# Altium PCB LM2576 Buck Converter.PcbDoc
Units mil, origin at the board's own origin, x right, y up, seen from the top; angles counter-clockwise.
Board outline 3170 x 1235.65 mil, 2 copper layers (Top Layer, Bottom Layer); 9 components, 6 nets, 25 pads, 4 vias.
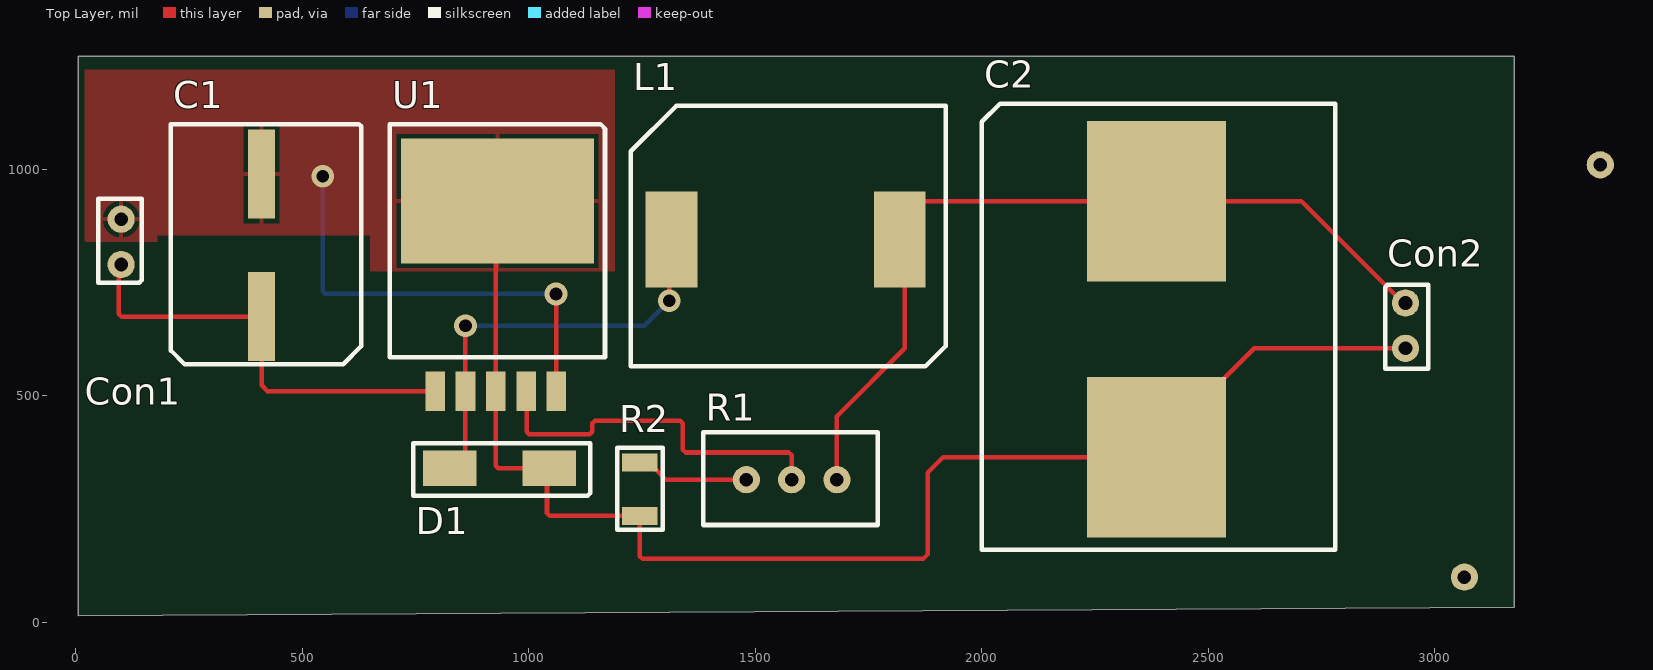
[diagram p0: Top Layer view]
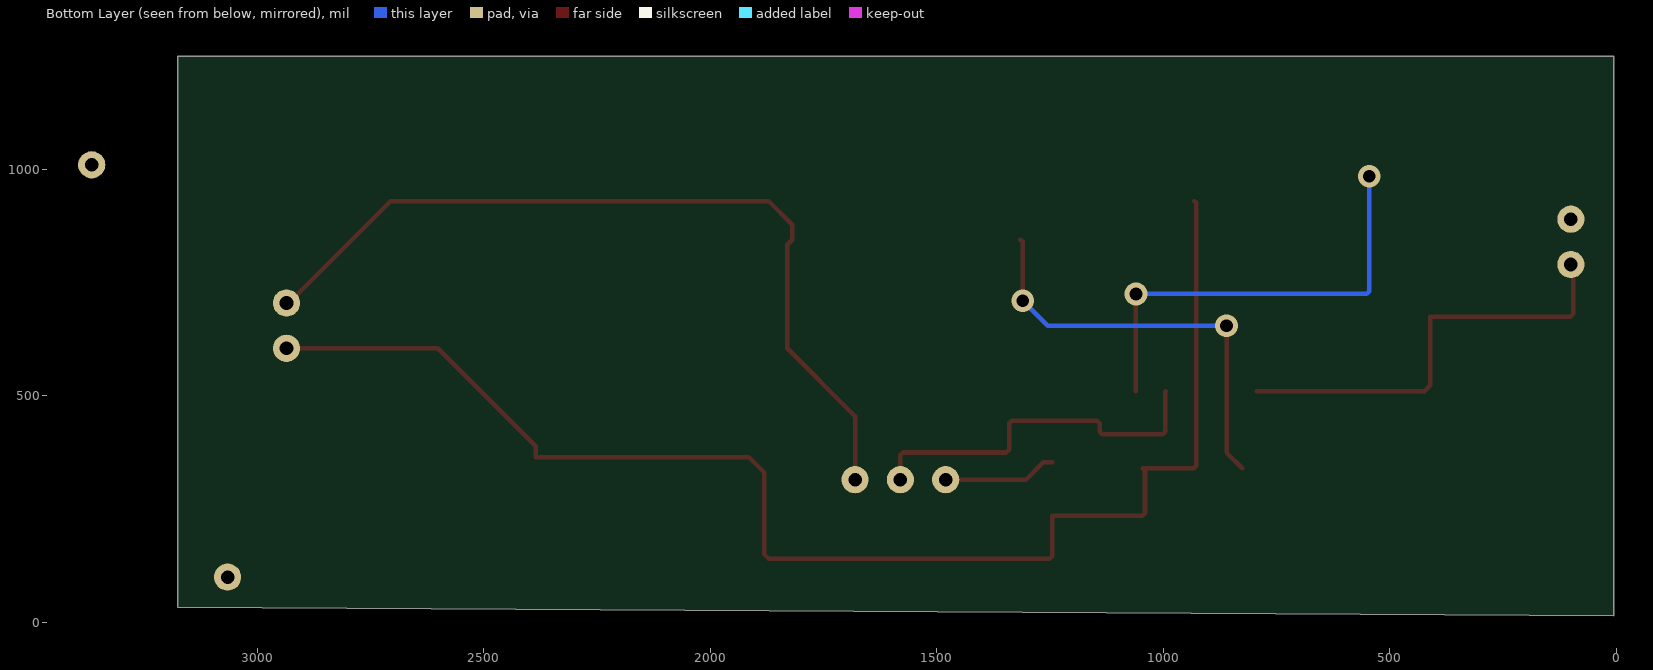
[diagram p1: Bottom Layer view, seen from below]
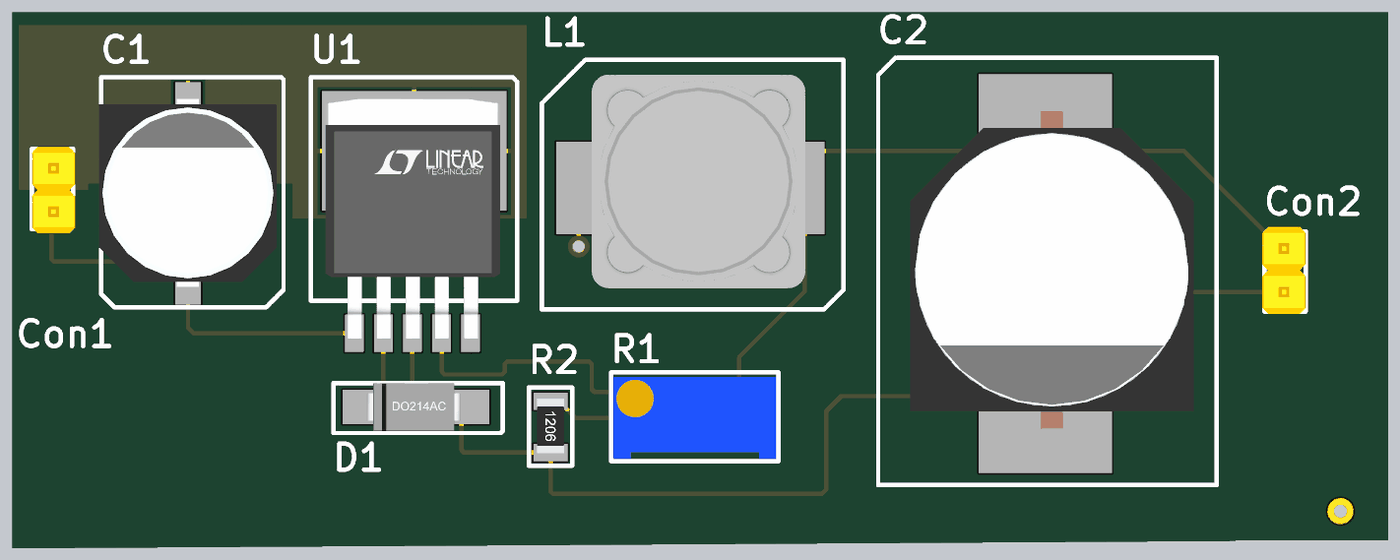
[diagram p2: 3D render of the assembled board from above, using the file's embedded part models]

## Layer stack, top to bottom
Top Solder: solder mask 0.4, Solder Resist, Dk 3.5
Top Layer: signal copper 1.4
Dielectric 1: dielectric 12.6, FR-4, Dk 4.8
Bottom Layer: signal copper 1.4
Bottom Solder: solder mask 0.4, Solder Resist, Dk 3.5

## Board outline
5,14.35 5,1250 3175,1250 3175,33.26

## Design rules (kind name [scope] priority, off if disabled: settings)
Clearance [All] p1: gap=10 ignorepadtopadclearanceinfootprint=FALSE except(0: Arc-Hole Track-Hole SMDPad-Hole THPad-Hole Via-Hole Fill-Hole Poly-Hole Region-Hole Text-Hole)
PolygonConnect [All] p1: connectstyle=Relief reliefconductorwidth=10 reliefentries=4 polygonreliefangle="90 Angle" airgapwidth=10
RoutingVias [All] p1: holewidth=28 width=50 viastyle="Through Hole" minholewidth=28 minwidth=50 maxholewidth=28 maxwidth=50
SilkToSilkClearance [All] p1: silktosilkclearance=0.1
SolderMaskExpansion [All] p1: expansion=4 istentingtop=FALSE
Width [All] p1: maxlimit=10 minlimit=10 preferedwidth=10
29 further rules are at their usual default settings.

## Components (designator, comment, footprint, x,y, rotation, side; value= is the part's Value field where it differs from the comment)
C1 "200uf" "220uF Capacitor" 410,675 r180 top
C2 "1000uf" "1000Uf Cap" 2385,930 r0 top
Con1 "Con?" 2pin 100,790 r180 top
Con2 "Con?" 2pin 2935,705 r0 top
D1 "1N5822" 1n5822 825,340 r0 top
L1 "150 uH" "150uH Inductor" 1315,845 r0 top
R1 "10K" "10K Pot" 1580,315 r270 top
R2 "1K" "1K 1206 Res" 1245,235 r90 top
U1 "LM2576" LM2576-TO63-5 793.07,510 r90 top

## Footprints (in the part's own frame and the unit in brackets; to place one, negate y for a bottom-side part, rotate by r counter-clockwise, add the part's x,y. Pads: shape width x height; smd on the part's side, far side on the other; paste and mask are expansions set on the pad)
"1K 1206 Res" [mm]
  rect 1x2 smd: 1(0,0) 2(3,0)
  silkscreen extent -0.76,-1.27 3.81,1.27, body extent -0.04,-0.8 3.16,0.8, height 0.56
1n5822 [mm]
  rect 3x2 smd: 1(0,0) 2(5.588,0)
  silkscreen extent -2.03,-1.52 7.87,1.4, body extent -0.08,-1.4 5.41,1.4, height 2.3
2pin [mil]
  round 60 hole 30: 1(0,0) 2(0,-100)
  silkscreen extent -45,-145 50,40, body extent -50,-150 50,50, height 374
"10K Pot" [mil]
  round 60 hole 30: 1(0,100) 2(0,0) 3(0,-100)
  silkscreen extent -105,-195 100,190, body extent -94,-190 94,185, height 455
"150uH Inductor" [mm]
  rect 2.9x5.4 smd: 1(0,0) 2(12.8,0)
  silkscreen extent -2.29,-7.11 15.37,7.49, body extent 0.64,-5.87 13.14,6.63, height 7.51
"220uF Capacitor" [mm]
  rect 1.5x5 smd: 1(0,0) 2(0,-8.001)
  silkscreen extent -5.59,-10.79 5.08,2.67, body extent -5.19,-9.53 5.21,1.47, height 10.41
"1000Uf Cap" [mm]
  rect 7.8x9 smd: 1(0,0) 2(0,-14.351)
  silkscreen extent -9.78,-19.56 10.03,5.46, body extent -7.92,-16.26 8.68,2.34, height 17.51
LM2576-TO63-5 [mm] "D2-PAK, 6-Pads, Body 7,42x8,51mm (max), IPC Medium Density"
  rect 2.2x1.1 smd: 1(0,0) 2(0,-1.7) 3(0,-3.4) 4(0,-5.1) 5(0,-6.8)
  rect 7x10.8 smd: 3(10.67,-3.5)
  silkscreen extent 1.91,-9.53 14.99,2.54, body extent -0.33,-8.54 13.72,1.68, height 4.38

## Part data
C1 C2: library part "Electrolytic Capacitor"
Con1 Con2: library part 2PinConnector
L1: library part "150UH L"
R1: library part "Variable Resistor"
R2: library part Resistor

## Free pads (board coordinates)
  round 60 hole 30: 6(3065,100) 9(3365,1010)

## Via types
v1: diameter 50, hole 28, Top Layer to Bottom Layer, tented both sides, 4 vias

## Nets (pads, with @x,y where several pads share a name; then routed paths per layer and width w, separated by ;. In a path a pad name is that pad's centre, name@x,y a point inside that pad or via, vN(x,y) a via of type N, cw(c..) or ccw(c..) an arc to the next point about the centre after c; other vN are vias at no path point)
GND: C1.2 C2.2 Con1.2 Con2.2 D1.2 R2.1 U1.3 U1.5 | length 4095.3
  Top Layer w10: U1.3@930.87,930.08 926.93,926.14 926.93,510 926.93,345.86 932.79,340 D1.2 1040,335 1040,240.86 1045.86,235 R2.1 1245,145.86 1250.86,140 1870,140 1880,150 1880,330 1915,365 C2.2 2385,388.62 2601.38,605 Con2.2 ; v1(1060,725) 1060,690 1060.79,689.21 U1.5
  Bottom Layer w10: v1(545,985) 545,730.86 550.86,725 v1(1060,725)
NetC1_1: C1.1 Con1.1 U1.1 | length 969.6
  Top Layer w10: Con1.1 95,785 95,680.86 100.86,675 C1.1 410,523.28 424.14,509.14 425,510 U1.1
NetC2_1: C2.1 Con2.1 L1.2 R1.1 | length 1860.5
  Top Layer w10: R1.1 1680,455 1830,605 1830,833.94 L1.2 1818.94,877.91 1871.02,930 C2.1 2705,930 2930,705 Con2.1
NetD1_1: D1.1 L1.1 U1.2 | length 939.7
  Top Layer w10: D1.1 825.63,340 860,374.37 U1.2 v1(860,655) ; v1(1310,710) 1310,840 L1.1
  Bottom Layer w10: v1(860,655) 1255,655 v1(1310,710)
NetR1_2: R1.2 U1.4 | length 819.9
  Top Layer w10: U1.4 995,508.86 995,420.86 1000.86,415 1134.14,415 1140,420.86 1140,439.14 1145.86,445 1334.14,445 1340,439.14 1340,380.86 1345.86,375 1574.14,375 1580,369.14 R1.2
NetR1_3: R1.3 R2.2 | length 250.8
  Top Layer w10: R2.2 1264.68,353.11 1302.8,315 R1.3

## Polygon pours and split planes (outlines as drawn)
GND on Top Layer "GND_L01_P000" (solid, pour order 0): 1190,1220 1190,775 650,775 650,855 180,855 180,840 25,840 20,835 20,1220